# Altium PCB encoders.PcbDoc
Units mm, origin at the board's own origin, x right, y up, seen from the top; angles counter-clockwise.
Board outline 135 x 22 mm, 2 copper layers (Top Layer, Bottom Layer); 31 components, 20 nets, 89 pads, 0 vias.
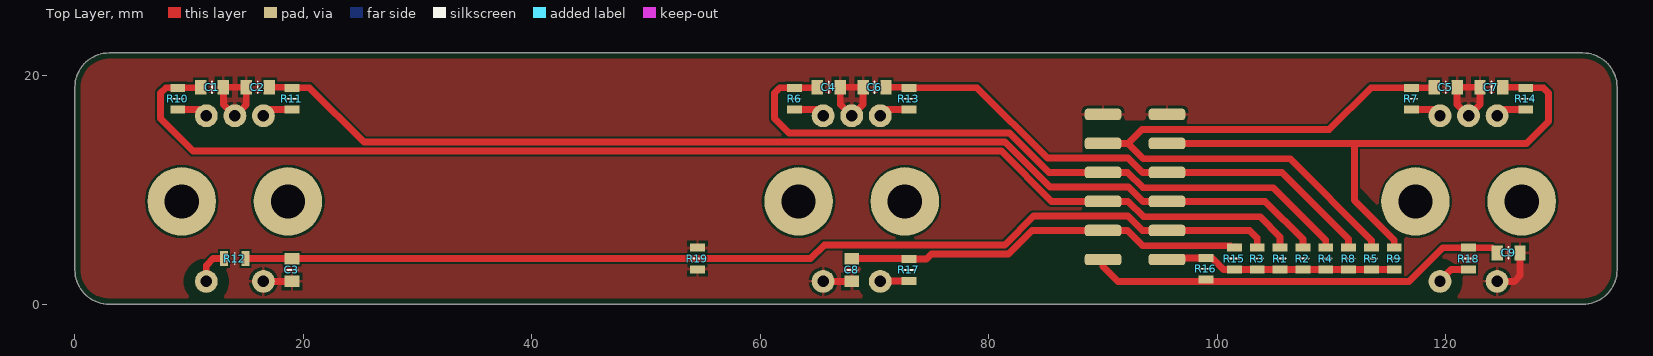
[diagram p0: Top Layer view]
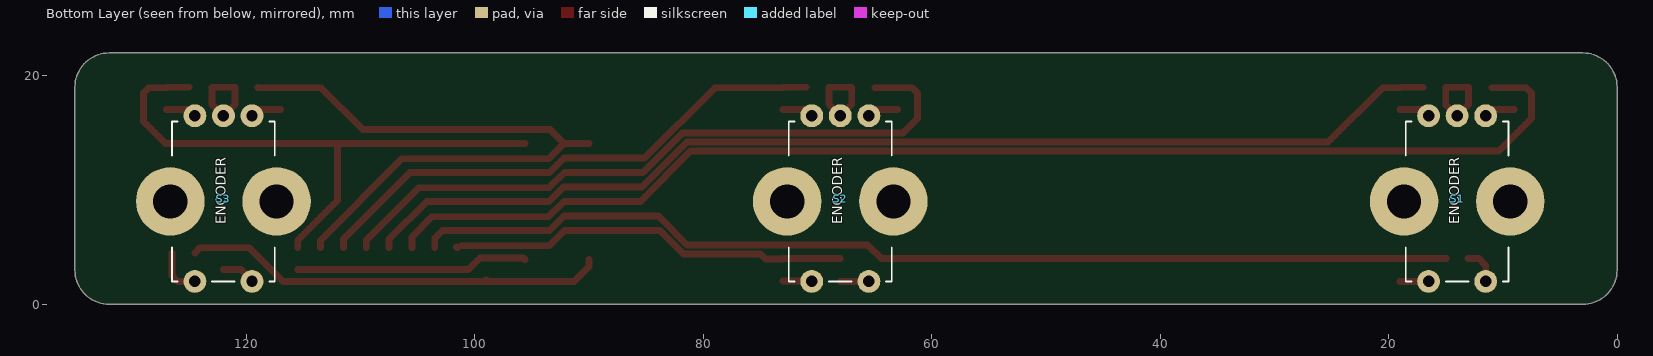
[diagram p1: Bottom Layer view, seen from below]
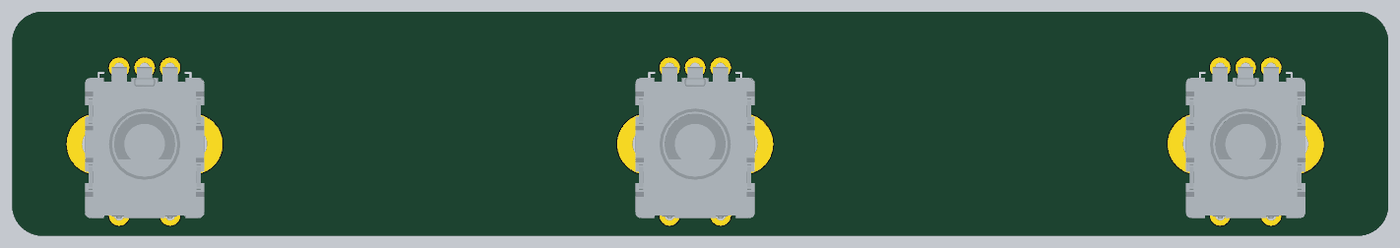
[diagram p2: 3D render of the assembled board from below, using the file's embedded part models]

## Layer stack, top to bottom
Top Solder: solder mask 0.0102, Solder Resist, Dk 3.5
Top Layer: signal copper 0.0356
Dielectric 1: dielectric 0.32, FR-4, Dk 4.8
Bottom Layer: signal copper 0.0356
Bottom Solder: solder mask 0.0102, Solder Resist, Dk 3.5

## Board outline
0,3 0,19 cw(c3,19) 3,22 132,22 cw(c132,19) 135,19 135,3 cw(c132,3) 132,0 3,0 cw(c3,3)

## Design rules (kind name [scope] priority, off if disabled: settings)
BoardOutlineClearance [All] p1: gap=0.5 ignorepadtopadclearanceinfootprint=FALSE
Clearance [All] p1: gap=0.2 ignorepadtopadclearanceinfootprint=FALSE
Height [All] p1: minheight=0 maxheight=30 prefheight=12.7
HoleSize [All] p1: absolutevalues=TRUE maxlimit=3 minlimit=0.5 maxpercent=80.000 minpercent=20.000
PolygonConnect [All] p1: connectstyle=Relief reliefconductorwidth=0.254 reliefentries=4 polygonreliefangle="90 Angle" airgapwidth=0.254
RoutingVias [All] p1: holewidth=0.711 width=1.27 viastyle="Through Hole" minholewidth=0.711 minwidth=1.27 maxholewidth=0.711 maxwidth=1.27
SolderMaskExpansion [All] p1: expansion=0.102
Width [All] p1: maxlimit=2 minlimit=0.4 preferedwidth=0.4
28 further rules are at their usual default settings.

## Components (designator, comment, footprint, x,y, rotation, side; value= is the part's Value field where it differs from the comment)
C1 "GRM21BR71H104K" 0805-CAP 12,19 r180 top value="0.1 мкФ"
C2 "GRM21BR71H104K" 0805-CAP 16,19 r0 top value="0.1 мкФ"
C3 "GRM21BR71H104K" 0805-CAP 19,3 r90 top value="0.1 мкФ"
C4 "GRM21BR71H104K" 0805-CAP 66,19 r180 top value="0.1 мкФ"
C5 "GRM21BR71H104K" 0805-CAP 120,19 r180 top value="0.1 мкФ"
C6 "GRM21BR71H104K" 0805-CAP 70,19 r0 top value="0.1 мкФ"
C7 "GRM21BR71H104K" 0805-CAP 124,19 r0 top value="0.1 мкФ"
C8 "GRM21BR71H104K" 0805-CAP 68,3 r90 top value="0.1 мкФ"
C9 "GRM21BR71H104K" 0805-CAP 125.5,4.5 r180 top value="0.1 мкФ"
R1 "RC0805FR-07100KL" 0805-RES 105.5,4 r270 top value="100 кОм"
R2 "RC0805FR-07100KL" 0805-RES 107.5,4 r270 top value="100 кОм"
R3 "RC0805FR-07100KL" 0805-RES 103.5,4 r270 top value="100 кОм"
R4 "RC0805FR-07100KL" 0805-RES 109.5,4 r270 top value="100 кОм"
R5 "RC0805FR-07100KL" 0805-RES 113.5,4 r270 top value="100 кОм"
R6 "RC0805FR-07100RL" 0805-RES 63,18 r270 top value="100 Ом"
R7 "RC0805FR-07100RL" 0805-RES 117,18 r270 top value="100 Ом"
R8 "RC0805FR-07100KL" 0805-RES 111.5,4 r270 top value="100 кОм"
R9 "RC0805FR-07100KL" 0805-RES 115.5,4 r270 top value="100 кОм"
R10 "RC0805FR-07100RL" 0805-RES 9,18 r270 top value="100 Ом"
R11 "RC0805FR-07100RL" 0805-RES 19,18 r270 top value="100 Ом"
R12 "RC0805FR-07100RL" 0805-RES 14,4 r180 top value="100 Ом"
R13 "RC0805FR-07100RL" 0805-RES 73,18 r270 top value="100 Ом"
R14 "RC0805FR-07100RL" 0805-RES 127,18 r270 top value="100 Ом"
R15 "RC0805FR-07100KL" 0805-RES 101.5,4 r270 top value="100 кОм"
R16 "RC0805FR-07100KL" 0805-RES 99,3.1 r90 top value="100 кОм"
R17 "RC0805FR-07100RL" 0805-RES 73,3 r270 top value="100 Ом"
R18 "RC0805FR-07100RL" 0805-RES 122,4 r270 top value="100 Ом"
R19 "RC0805FR-07100RL" 0805-RES 54.5,4 r90 top value="100 Ом"
S1 "EC11" 482020514001 14,9 r90 bottom locked
S2 "EC11" 482020514001 68,9 r90 bottom locked
S3 "EC11" 482020514001 122,9 r90 bottom locked

## Footprints (in the part's own frame and the unit in brackets; to place one, negate y for a bottom-side part, rotate by r counter-clockwise, add the part's x,y. Pads: shape width x height; smd on the part's side, far side on the other; paste and mask are expansions set on the pad)
0805-CAP [mm] "Согласно IPC-SM-782"
  rect 1x1.3 smd: 1(-1,0) 2(1,0)
  silkscreen extent 0,-0.51 0,0.51, body extent -1,-0.6 1,0.6, height 1.2
0805-RES [mm] "Standard Thick Film Chip Resistors D/CRCW e3 Vishay"
  rect 0.7x1.3 smd: 1(-0.95,0) 2(0.95,0)
  silkscreen extent 0,-0.51 0,0.51, body extent -1,-0.63 1,0.63, height 0.5
482020514001 [mm] "Энкодер, с кнопкой"
  round 2 hole 1: 1(-7,-2.5) 2(-7,2.5) A(7.5,-2.5) B(7.5,2.5) C(7.5,0)
  round 6 hole 3: PAD(0,-4.65) PAD(0,4.65)
  silkscreen extent -7,-4.5 7,4.5, body extent -7.3,-5.85 7.6,5.85, height 26.4

## Part data
C1 C2 C3 C4 C5 C6 C7 C8 C9: library part CMP-0544-A.1, "Конденсатор керамический, 0.1 мкФ, X7R, 50 В, точность 10%, 0805", Voltage="50 В", Accuracy=10%
R1 R2 R3 R4 R5 R8 R9 R15 R16: library part CMP-0672-A.2, "Резистор, 100 кОм, 0.125 Вт, точность 1%, 0805", Manufacturer=YAGEO, Temperature="-55 - 155°C", Accuracy=1%
R6 R7 R10 R11 R12 R13 R14 R17 R18 R19: library part CMP-0727-A.1, "Резистор, 100 Ом, 0.125 Вт, точность 1%, 0805", Manufacturer=YAGEO, Temperature="-55 - 155°C", Accuracy=1%
S1 S2 S3: library part CMP-0735-A.1, "Энкодер, с кнопкой, монтаж в отверстия", Manufacturer=NA, Temperature=NA

## Free pads (board coordinates)
  rrect50% 3.2x1 smd: 1(90,3.92) 2(95.6,3.92) 3(90,6.46) 4(95.6,6.46) 5(90,9) 6(95.6,9) 7(90,11.54) 8(95.6,11.54) 9(90,14.08) 10(95.6,14.08) 11(90,16.62) 12(95.6,16.62)

## Nets (pads, with @x,y where several pads share a name; then routed paths per layer and width w, separated by ;. In a path a pad name is that pad's centre, name@x,y a point inside that pad or via, vN(x,y) a via of type N, cw(c..) or ccw(c..) an arc to the next point about the centre after c; other vN are vias at no path point)
3V3: pad.2 R1.2 R2.2 R3.2 R4.2 R5.2 R8.2 R9.2 R15.2 R16.2 | length 20.4
  Top Layer w0.6: pad.2 95.73,4.05 R16.2 99.55,4.05 100.55,3.05 R15.2 R3.2 R1.2 R2.2 R4.2 R8.2 R5.2 R9.2
ENC0_A: C1.2 pad.5 R1.1 R10.1 | length 109.1
  Top Layer w0.6: C1.2@10.95,18.95 R10.1 7.95,18.95 7.5,18.5 7.5,16.25 10.35,13.4 81.1,13.4 85.5,9 92.2,9 93.54,7.66 103.74,7.66 105.5,5.9 R1.1
ENC0_B: C2.2 pad.6 R2.1 R11.1 | length 96.7
  Top Layer w0.6: C2.2 R11.1@18.95,19 ; R11.1 20.55,18.95 25.3,14.2 81.431,14.2 85.371,10.26 92.24,10.26 93.5,9 104.2,9 107.5,5.7 R2.1
ENC0_SW: C3.2 pad.4 R3.1 R12.1 | length 91.7
  Top Layer w0.6: R12.1 C3.2 64.4,4 65.6,5.2 81.4,5.2 83.92,7.72 92.18,7.72 93.44,6.46 pad.4 102.84,6.46 103.5,5.8 R3.1
ENC1_A: C4.2 pad.7 R4.1 R6.1 | length 59.4
  Top Layer w0.6: C4.2@64.95,18.95 R6.1 61.7,18.95 61.25,18.5 61.25,16.25 62.5,15 81.8,15 85.26,11.54 92.16,11.54 93.5,10.2 104.9,10.2 109.5,5.6 R4.1
ENC1_B: C6.2 pad.8 R8.1 R13.1 | length 46.7
  Top Layer w0.6: C6.2 R13.1@72.95,19 ; R13.1 78.981,18.95 85.131,12.8 92.2,12.8 93.46,11.54 105.66,11.54 111.5,5.7 R8.1
ENC1_SW: C8.2 pad.3 R15.1 R17.1 | length 34.9
  Top Layer w0.6: C8.2 72.95,4 cw(c72.95,3.95) R17.1 74.55,3.95 75,4.4 81.731,4.4 83.791,6.46 92.14,6.46 93.48,5.12 R15.1@101.18,5.12 ; R15.1 101.55,4.95 R15.1@101.6,5
ENC2_A: C5.2 pad.9 R5.1 R7.1 | length 56.5
  Top Layer w0.6: pad.9 92.18,14.08 ; R5.1 113.5,5.6 106.36,12.74 93.52,12.74 92.18,14.08 ; C5.2 118.95,18.95 R7.1 113.45,18.95 109.8,15.3 93.4,15.3 92.18,14.08
ENC2_B: C7.2 pad.10 R9.1 R14.1 | length 51.5
  Top Layer w0.6: pad.10 112,14.08 ; R9.1 115.5,5.6 112,9.1 112,14.08 ; C7.2 126.95,19 R14.1 128.55,18.95 129,18.5 129,16 127.08,14.08 112,14.08
ENC2_SW: C9.2 pad.1 R16.1 R18.1 | length 37.5
  Top Layer w0.6: pad.1 90,3.3 91.3,2 R16.1@98.85,2 ; C9.2 124.05,4.95 R18.1 119.75,4.95 116.8,2 R16.1@99.15,2 ; R16.1@98.85,2 R16.1 R16.1@99.15,2 ; R16.1@98.85,2 R16.1@99.15,2
GND: C1.1 C2.1 C3.1 C4.1 C5.1 C6.1 C7.1 C8.1 C9.1 pad.11 pad.12 R19.1 R19.2 S1.2 S1.C S2.1 S2.C S3.2 S3.C | length 32.7
  Top Layer w0.6: S1.2 C3.1 ; S2.1 C8.1 ; S3.2 126,2 126.5,2.5 C9.1 ; 13,17.5 S1.C 15,17.5 C2.1 C1.1 13,17.5 ; 67,17.5 S2.C 69,17.5 C6.1 C4.1 67,17.5 ; 121,17.5 C5.1 C7.1 123,17.5 S3.C 121,17.5
NetR6_2: R6.2 S2.A | length 2.7
  Top Layer w0.6: R6.2 64.95,17.05 S2.A
NetR7_2: R7.2 S3.A | length 2.7
  Top Layer w0.6: R7.2 118.95,17.05 S3.A
NetR10_2: R10.2 S1.A | length 2.7
  Top Layer w0.6: R10.2 10.95,17.05 S1.A
NetR11_2: R11.2 S1.B | length 2.7
  Top Layer w0.6: S1.B 17.05,17.05 R11.2
NetR12_2: R12.2 S1.1 | length 3.2
  Top Layer w0.6: S1.1 11.5,3.4 12.1,4 R12.2
NetR13_2: R13.2 S2.B | length 2.7
  Top Layer w0.6: S2.B 71.05,17.05 R13.2
NetR14_2: R14.2 S3.B | length 2.7
  Top Layer w0.6: S3.B 125.05,17.05 R14.2
NetR17_2: R17.2 S2.2 | length 2.5
  Top Layer w0.6: S2.2 70.55,2.05 R17.2
NetR18_2: R18.2 S3.1 | length 3
  Top Layer w0.6: S3.1 119.45,2.05 120.45,3.05 R18.2
pads on no net: S1.PAD S2.PAD S3.PAD

## Polygon pours and split planes (outlines as drawn)
GND on Top Layer "GND" (solid, remove dead copper, pour order 0): 135,-3 0,-3 0,22 135,22

## Other copper
Top Layer:
  pour cut-out: 125.2,15.6 117.6,15.6 117.6,14.5 125.2,14.5
  pour cut-out: 88.2,6 88.191,5.991 88.191,4.09 89.41,4.09 90.9,2.6 94.6,2.6 94.6,6
  pour cut-out: 99.5,13.5 99.6,13.4 99.6,3 116.35,3 116.35,6.35 112,10.7 112,11.6 110.2,13.4
  pour cut-out: 95.4,16.1 88.2,16.1 88.2,13.2 95.4,13.2
  pour cut-out: 8,16.5 10.6,13.9 25,13.9 25.3,14.2 23,16.5
  pour cut-out: 119.7,18.4 119.7,17.3 115.9,17.3 115.9,18.4
  pour cut-out: 124.3,18.4 124.3,17.3 128.1,17.3 128.1,18.4
  pour cut-out: 65.7,18.4 65.7,17.3 61.9,17.3 61.9,18.4
  pour cut-out: 70.3,18.4 70.3,17.3 74.1,17.3 74.1,18.4
  pour cut-out: 16.3,18.4 16.3,17.3 20.1,17.3 20.1,18.4
  pour cut-out: 11.7,18.4 11.7,17.3 7.9,17.3 7.9,18.4
  pour cut-out: 65.5,16.5 67.5,16.5 ccw(c65.5,16.5) 65.5,18.5 ccw(c65.5,16.5) 63.5,16.5 ccw(c65.5,16.5) 65.5,14.5 ccw(c65.5,16.5) 67.5,16.5
  pour cut-out: 70.5,16.5 72.5,16.5 ccw(c70.5,16.5) 70.5,18.5 ccw(c70.5,16.5) 68.5,16.5 ccw(c70.5,16.5) 70.5,14.5 ccw(c70.5,16.5) 72.5,16.5
  pour cut-out: 11.5,16.5 13.5,16.5 ccw(c11.5,16.5) 11.5,18.5 ccw(c11.5,16.5) 9.5,16.5 ccw(c11.5,16.5) 11.5,14.5 ccw(c11.5,16.5) 13.5,16.5
  pour cut-out: 16.5,16.5 18.5,16.5 ccw(c16.5,16.5) 16.5,18.5 ccw(c16.5,16.5) 14.5,16.5 ccw(c16.5,16.5) 16.5,14.5 ccw(c16.5,16.5) 18.5,16.5
  pour cut-out: 11.5,2 13.5,2 ccw(c11.5,2) 11.5,4 ccw(c11.5,2) 9.5,2 ccw(c11.5,2) 11.5,0 ccw(c11.5,2) 13.5,2
  pour cut-out: 119.5,2 121.5,2 ccw(c119.5,2) 119.5,4 ccw(c119.5,2) 117.5,2 ccw(c119.5,2) 119.5,0 ccw(c119.5,2) 121.5,2
  pour cut-out: 119.5,16.5 121.5,16.5 ccw(c119.5,16.5) 119.5,18.5 ccw(c119.5,16.5) 117.5,16.5 ccw(c119.5,16.5) 119.5,14.5 ccw(c119.5,16.5) 121.5,16.5
  pour cut-out: 124.5,16.5 126.5,16.5 ccw(c124.5,16.5) 124.5,18.5 ccw(c124.5,16.5) 122.5,16.5 ccw(c124.5,16.5) 124.5,14.5 ccw(c124.5,16.5) 126.5,16.5
  pour cut-out: 70.5,2 72.5,2 ccw(c70.5,2) 70.5,4 ccw(c70.5,2) 68.5,2 ccw(c70.5,2) 70.5,0 ccw(c70.5,2) 72.5,2

## Silkscreen, mask and mechanical layers (free items; w line width, h text height)
Mechanical 1:
  the board outline again, w0.1

## Text inside footprints (layer, text, board x,y; h text height)
S1: Bottom Overlay "ENCODER" at 13.5,7 h1.5 r270
S2: Bottom Overlay "ENCODER" at 67.5,7 h1.5 r270
S3: Bottom Overlay "ENCODER" at 121.5,7 h1.5 r270